# Altium PCB Hot_plate.PcbDoc
Units mm, origin at the board's own origin, x right, y up, seen from the top; angles counter-clockwise.
Board outline 110 x 50 mm, 2 copper layers (Top Layer, Bottom Layer); 26 components, 22 nets, 78 pads, 164 vias.
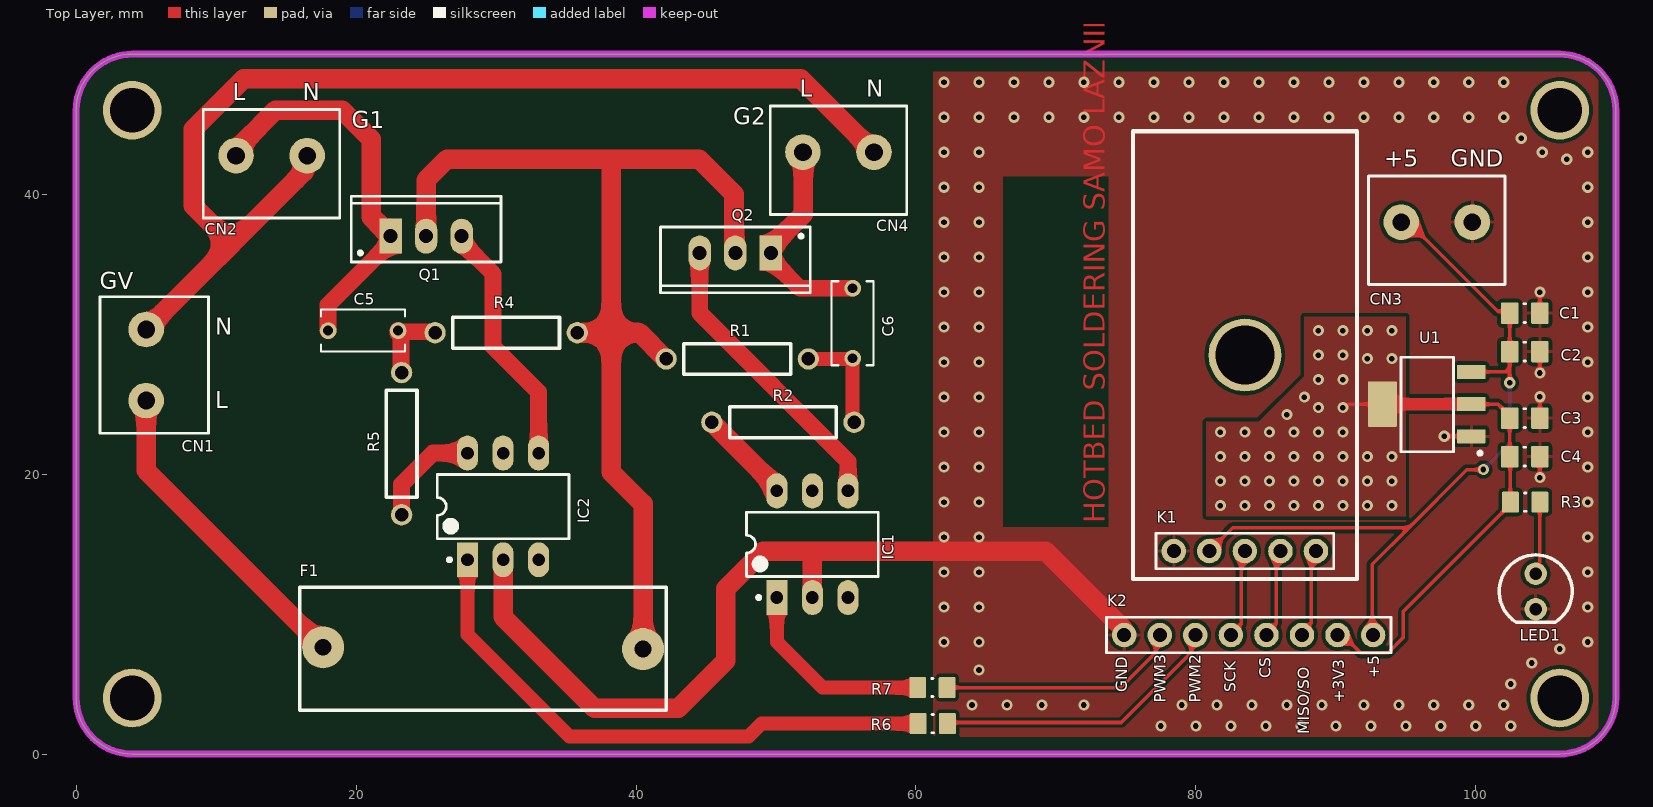
[diagram p0: Top Layer view]
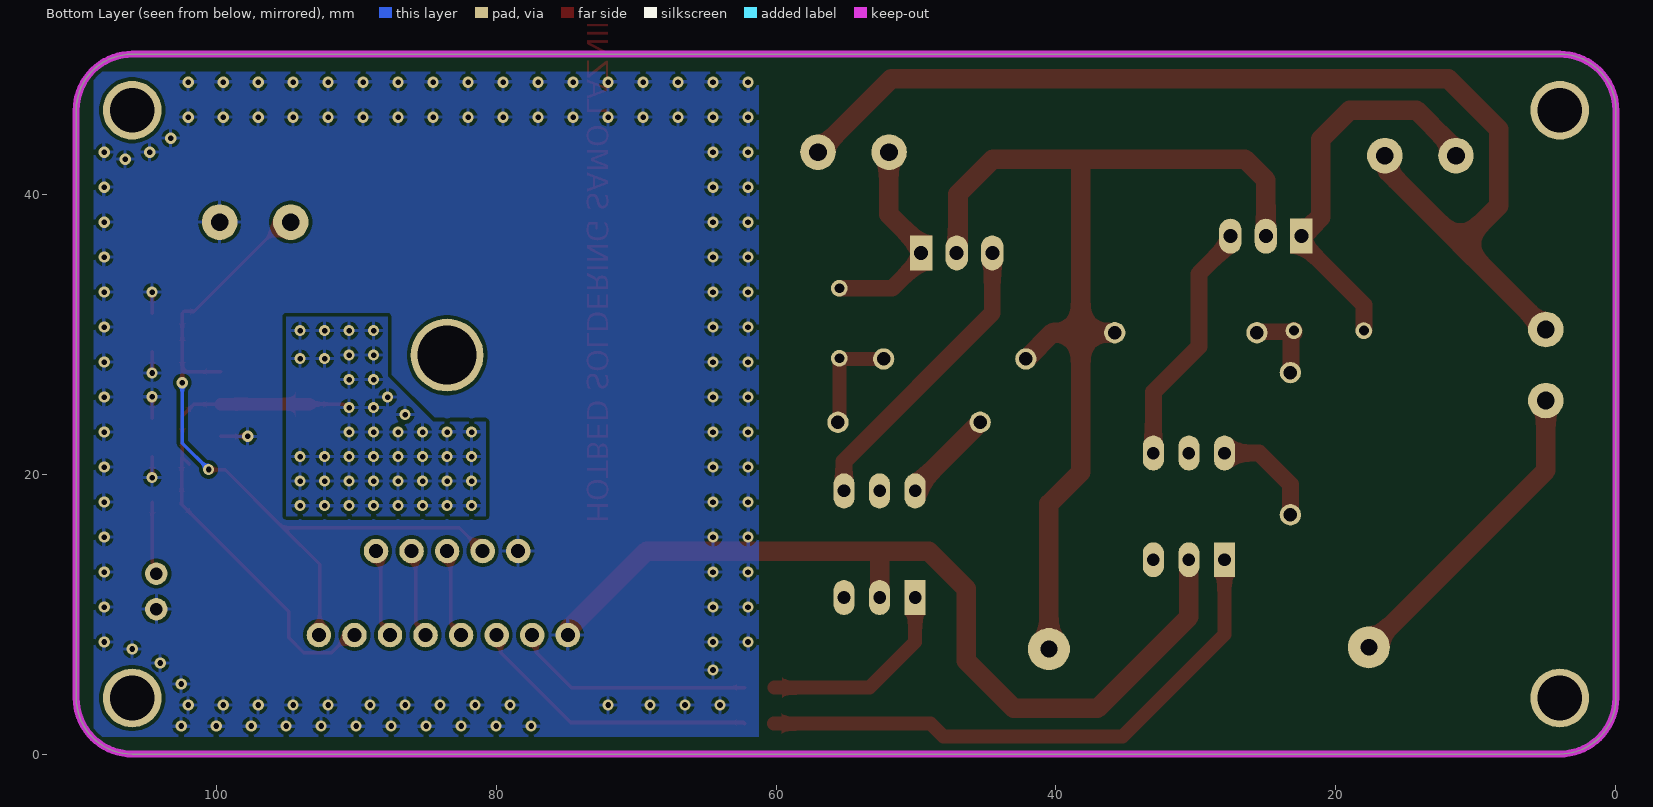
[diagram p1: Bottom Layer view, seen from below]

## Layer stack, top to bottom
Top Solder: solder mask 0.0102, Solder Resist, Dk 3.5
Top Layer: signal copper 0.0356
Dielectric 1: dielectric 0.32, FR-4, Dk 4.8
Bottom Layer: signal copper 0.0356
Bottom Solder: solder mask 0.0102, Solder Resist, Dk 3.5

## Board outline
0,4 0,46 cw(c4,46) 4,50 106,50 cw(c106,46) 110,46 110,3.995 110,4 cw(c106,4) 106,0 4,0 cw(c4,4)

## Design rules (kind name [scope] priority, off if disabled: settings)
Clearance [All] p1: gap=0.254 ignorepadtopadclearanceinfootprint=FALSE except(0: Arc-Hole Track-Hole SMDPad-Hole THPad-Hole Via-Hole Fill-Hole Poly-Hole Region-Hole Text-Hole)
PolygonConnect PolygonConnect_4 [All vs IsNamedPolygon('GND_TOP')] p1: thpad.connectstyle=Relief thpad.reliefconductorwidth=0.254 thpad.reliefentries=4 thpad.polygonreliefangle="90 Angle" thpad.airgapwidth=0.254 smdpad.connectstyle=Relief smdpad.reliefconductorwidth=0.254 smdpad.reliefentries=4 smdpad.polygonreliefangle="90 Angle" smdpad.airgapwidth=0.254 via.connectstyle=Direct via.reliefconductorwidth=0.254 via.reliefentries=4 via.polygonreliefangle="90 Angle" via.airgapwidth=0.254
PolygonConnect PolygonConnect_3 [All vs IsNamedPolygon('Hlajenje 3v3_TOP')] p2: thpad.connectstyle=Relief thpad.reliefconductorwidth=0.254 thpad.reliefentries=4 thpad.polygonreliefangle="90 Angle" thpad.airgapwidth=0.254 smdpad.connectstyle=Direct smdpad.reliefconductorwidth=0.254 smdpad.reliefentries=4 smdpad.polygonreliefangle="90 Angle" smdpad.airgapwidth=0.254 via.connectstyle=Direct via.reliefconductorwidth=0.254 via.reliefentries=4 via.polygonreliefangle="90 Angle" via.airgapwidth=0.254
PolygonConnect PolygonConnect_2 [All vs IsNamedPolygon('Hlajenje 3v3_TOP')] p3: connectstyle=Relief reliefconductorwidth=0.254 reliefentries=4 polygonreliefangle="90 Angle" airgapwidth=0.254
PolygonConnect PolygonConnect_1 [All vs IsNamedPolygon('Hlajenje 3v3_TOP')] p4: thpad.connectstyle=Relief thpad.reliefconductorwidth=0.254 thpad.reliefentries=4 thpad.polygonreliefangle="90 Angle" thpad.airgapwidth=0.254 smdpad.connectstyle=Direct smdpad.reliefconductorwidth=0.254 smdpad.reliefentries=4 smdpad.polygonreliefangle="90 Angle" smdpad.airgapwidth=0.254 via.connectstyle=Direct via.reliefconductorwidth=0.254 via.reliefentries=4 via.polygonreliefangle="90 Angle" via.airgapwidth=0.254
PolygonConnect [All] p5: connectstyle=Relief reliefconductorwidth=0.254 reliefentries=4 polygonreliefangle="90 Angle" airgapwidth=0.254
RoutingVias [All] p1: holewidth=0.4 width=0.8 viastyle="Through Hole" minholewidth=0.3 minwidth=0.7 maxholewidth=0.8 maxwidth=1.2
SolderMaskExpansion [All] p1: expansion=0.102 istentingtop=FALSE
Width [All] p1: maxlimit=2.54 minlimit=0.254 preferedwidth=0.254
30 further rules are at their usual default settings.

## Classes and differential pairs
component class "Components Class2": C5 C6 CN1 CN2 CN4 F1 Q1 Q2 R1 R2 R4 R5
component class "Components Class1": C6 CN4 Q2 R1 R2
component class Hot_plate: C1 C2 C3 C4 C5 C6 CN1 CN2 CN3 CN4 F1 IC2 K1 K2 LED1 Q1 Q2 R3 R4 R5 R6 R7 U1

## Components (designator, comment, footprint, x,y, rotation, side; value= is the part's Value field where it differs from the comment)
C1 "4u7" C2012_0805I_M 103.5,31.5 r0 top
C2 "4u7" C2012_0805I_M 103.5,28.75 r0 top
C3 "4u7" C2012_0805I_M 103.5,24 r0 top
C4 "4u7" C2012_0805I_M 103.5,21.25 r0 top
C5 "100n" "C ceramic F5mm" 23,30.25 r180 top
C6 "100n" "C ceramic F5mm" 55.475,28.275 r90 top
CN1 "VRSTNA SPONKA 2P/16A" "VRSTNA SPONKA 2P/16A" 5,25.25 r90 top
CN2 "VRSTNA SPONKA 2P/16A" "VRSTNA SPONKA 2P/16A" 11.42,42.75 r0 top
CN3 "VRSTNA SPONKA 2P/16A" "VRSTNA SPONKA 2P/16A" 94.67,38 r0 top
CN4 "VRSTNA SPONKA 2P/16A" "VRSTNA SPONKA 2P/16A" 51.92,43 r0 top
F1 "Fuse" FUSE-holder 17.64,7.627 r0 top
IC1 "MOC3041" DIP-6_L 50.06,11.18 r0 top
IC2 "MOC3041" DIP-6_L 27.96,13.88 r0 top
K1 "H1x5" H1x5 88.58,14.5 r0 top
K2 "H1x8" H1x8 92.66,8.5 r0 top
LED1 "GEEN" LED-THT_5 104.276,12.886 r0 top
Q1 "BTA16-600BQ" TO-220AB 25,37 r0 top
Q2 "BTA16-600BQ" TO-220AB 47.09,35.8 r180 top
R1 "470R" R400 42.15,28.225 r0 top
R2 "380R" R400 55.575,23.7 r180 top
R3 "50R" R2012_0805I_M 103.525,18 r0 top
R4 "470R" R400 35.8,30.1 r180 top
R5 "380R" R400 23.25,27.25 r270 top
R6 "200R" R2012_0805I_M 61.2,2.175 r0 top
R7 "200R" R2012_0805I_M 61.175,4.75 r0 top
U1 "LM1117MPX-3.3" DCY0004A_M 96.5,25 r180 top

## Footprints (in the part's own frame and the unit in brackets; to place one, negate y for a bottom-side part, rotate by r counter-clockwise, add the part's x,y. Pads: shape width x height; smd on the part's side, far side on the other; paste and mask are expansions set on the pad)
C2012_0805I_M [mm] "Chip Capacitor, 2-Leads, Body 2.05x1.25mm, IPC Low Density"
  rrect15% 1.25x1.55 smd: 1(-1.075,0) 2(1.075,0)
  silkscreen extent -0.05,-0.67 0.05,0.68, body extent -1.1,-0.7 1.1,0.7, height 1.4
"C ceramic F5mm" [mm]
  round 1.2 hole 0.7: 1(0,0) 2(5,0)
  silkscreen extent -0.5,-1.5 5.5,1.5, body extent -0.3,-1.25 5.3,1.25, height 5
DCY0004A_M [mm]
  rrect10% 2.05x1 smd: 1(-3.175,2.3) 2(-3.175,0) 3(-3.175,-2.3)
  rrect5% 2.05x3.25 smd: 4(3.175,0)
  silkscreen extent -3.93,-3.35 1.85,3.62, body extent -3.5,-3.25 3.5,3.25, height 1.62
DIP-6_L [mm]
  rect 1.5x2.5 hole 0.9: 1(0,0)
  oval 1.5x2.5 hole 0.9: 2(2.54,0) 3(5.08,0) 4(5.08,7.62) 5(2.54,7.62) 6(0,7.62)
  silkscreen extent -2.16,-0.12 7.24,6.1, body extent -0.99,-0.17 6.13,7.7, height 4.3
FUSE-holder [mm]
  round 3 hole 1.2: 1(0,0) 2(22.86,-0.127)
  silkscreen extent -1.68,-4.5 24.51,4.29, body extent -0.18,-4.63 22.98,4.37, height 13.44
H1x5 [mm]
  round 1.75 hole 1: 1(0,0) 2(-2.54,0) 3(-5.08,0) 4(-7.62,0) 5(-10.16,0)
  silkscreen extent -11.43,-1.27 1.27,1.27, body extent -11.43,-1.27 1.27,1.27, height 8.4
H1x8 [mm]
  round 1.75 hole 1: 1(0,0) 2(-2.54,0) 3(-5.08,0) 4(-7.62,0) 5(-10.16,0) 6(-12.7,0) 7(-15.24,0) 8(-17.78,0)
  silkscreen extent -19.05,-1.27 1.27,1.27, body extent -19.05,-1.27 1.27,1.27, height 8.4
LED-THT_5 [mm] "LED; 2 Leads"
  round 1.6 hole 0.9: 1(0,0) 2(0,-2.54)
  silkscreen extent -2.6,-3.47 2.6,1.34, body extent -2.93,-3.79 2.87,1.6, height 24
R400 [mil]
  round 60 hole 38: 1(0,0) 2(400,0)
  silkscreen extent 50,-43 350,43, body extent -12,-45 412,46, height 91
R2012_0805I_M [mm] "Chip Resistor, 2-Leads, Body 2.05x1.25mm, IPC Low Density"
  rrect15% 1.2x1.5 smd: 1(-1.05,0) 2(1.05,0)
  silkscreen extent -0.05,-0.65 0.05,0.65, body extent -1.1,-0.7 1.1,0.7, height 0.8
TO-220AB [mm] "TO, Thru-Hole, Vertical, Heatsink Mounted; 3 In-Line Leads; Pitch 2.54 mm"
  rect 1.6x2.5 hole 1: 1(-2.54,0)
  oval 1.6x2.5 hole 1: 2(0,0) 3(2.54,0)
  silkscreen extent -5.35,-1.85 5.35,2.85, body extent -5.2,-1.73 5.2,2.77, height 19
"VRSTNA SPONKA 2P/16A" [mm]
  round 2.54 hole 1.27: 1(0,0) 2(5.08,0)
  silkscreen extent -2.34,-4.44 7.42,3.3, body extent -2.46,-4.57 7.54,3.43, height 10.01

## Part data
C1 C2 C3 C4 C5 C6: library part C, "Capacitor"
IC1 IC2: library part MOC3041M, "Zero-Cross Oproisolator Triac Driver Output", Case Style="DIP 6", Manufacturer="FAIRCHILD SEMICONDUCTOR", AVK Code=3064001000, ComponentLink1Description=Datasheet, ComponentLink1URL=http://www.farnell.com/datasheets/1639837.pdf, ComponentLink2Description="Datasheet 2", ComponentLink2URL=http://www.farnell.com/datasheets/410597.pdf, Manufacturer Part Number=MOC3041M, Pricing="1=1,31, 25=0,9, 100=0,72, 250=0,61, 500=0,35 (EUR)", RoHS=YES
K1: "Header 1x5 (male)"
K2: "Header 1x8 (male)"
LED1: library part LED, "L-7104ZGCK", Case Style="0805 [2012 Metric]", AVK Code=17002000201, LatestRevisionDate=08-Jul-2005, LatestRevisionNote="Mech Layer 1 removed.", PackageDescription="LED; 2 Leads", PackageReference=LED-0, Published=8-Jun-2000, Publisher="Altium Limited"
Q1 Q2: library part Triac, "SENSITIVE GATE TRIAC"
R1 R2 R3 R4 R5 R6 R7: library part R, "R"
U1: "800mA Low-Dropout Linear Regulator, 4-pin SOT-223, Pb-Free /  / DataSheet:  / https://www.ti.com/lit/ds/symlink/lm1117.pdf?ts=1629838143263&ref_url=https%253A%252F%252Fwww.google.com%252F", Manufacturer="Texas Instruments", PackageTopMarking=XYTT*N05A, PartNumber=LM1117MPX-3.3/NOPB, PowerWise=N, Code=FRL-33-LM1117, Code_IPC=SOT223-4, Code_JEDEC=TO-261-AA, ComponentLink1Description="Datasheet URL", ComponentLink1URL=http://www.ti.com/general/docs/lit/getliterature.tsp?genericPartNumber=LM1117-N&fileType=pdf, CompType="LDO IC", High-Reliability=Y, PackageDescription="Molded SOT-223, 6.50 x 3.56 x 1.6mm Body, 4 Lead, 2.3mm Pitch", PackageReference=DCY0004A, PinCount=4, RoHS=Y
F1: ComponentLink1Description=http://www.littelfuse.com/data/en/Data_Sheets/646_648_640_LF_050901.pdf, ComponentLink1URL=http://www.littelfuse.com/data/en/Data_Sheets/646_648_640_LF_050901.pdf

## Free pads (board coordinates)
  round 4.2 hole 3.2: 7(4,46) 8(4,4) 9(106,4) 10(106,46)
  round 5.2 hole 4.2: 11(83.5,28.5)

## Via types
v1: diameter 0.8, hole 0.4, Top Layer to Bottom Layer, tented both sides, 164 vias

## Nets (pads, with @x,y where several pads share a name; then routed paths per layer and width w, separated by ;. In a path a pad name is that pad's centre, name@x,y a point inside that pad or via, vN(x,y) a via of type N, cw(c..) or ccw(c..) an arc to the next point about the centre after c; other vN are vias at no path point)
+3V3: C3.1 C4.1 K2.2 R3.1 U1.2 U1.4 | length 37.8
  Top Layer w0.254: K2.2 90.5,8.5 91.756,7.244 93.744,7.244 94.8,8.3 94.8,10.175 102.475,17.85 R3.1 102.461,18.014 102.461,21.214 C4.1 ; v1(90.5,24.75) 90.648,24.75 90.898,25 U1.4 ; U1.2 99.684,24.991 101.584,24.991 102.425,24.15 102.425,21.215 C4.1@101.927,20.717
  Top Layer w0.9: U1.4 U1.2
  other v1: 81.75,17.75 83.5,17.75 85.25,17.75 87,17.75 88.75,17.75 90.5,17.75 92.25,17.75 94,17.75 81.75,19.5 83.5,19.5 85.25,19.5 87,19.5 88.75,19.5 90.5,19.5 92.25,19.5 94,19.5 81.75,21.25 83.5,21.25 85.25,21.25 87,21.25 88.75,21.25 90.5,21.25 92.25,21.25 94,21.25 81.75,23 83.5,23 85.25,23 87,23 88.75,23 90.5,23 86.5,24.25 88.75,24.75 87.75,25.5 88.75,26.75 90.5,26.75 92.25,28.25 94,28.25 88.75,28.5 90.5,28.5 88.75,30.25 90.5,30.25 92.25,30.25 94,30.25
+5: C1.1 C2.1 CN3.1 K1.4 K2.1 U1.3 | length 56.1
  Top Layer w0.254: K1.4 82.635,16.175 95.222,16.175 ; K2.1 92.597,8.563 92.597,13.551 95.222,16.175 ; CN3.1 95.199,38 101.568,31.632 102.293,31.632 C1.1 C2.1 102.425,27.594 ; U1.3 102.131,27.3 102.425,27.594 ; v1(100.539,20.329) 100.521,20.31 99.357,20.31 95.222,16.175 ; v1(102.425,26.525) 102.425,27.594
  Bottom Layer w0.254: v1(100.539,20.329) 102.425,22.214 v1(102.425,26.525)
CS: K1.2 K2.4 | length 6.4
  Top Layer w0.254: K2.4 85.04,8.646 85.75,9.356 85.75,13.805 86.04,14.095 K1.2
GND: C1.2 C2.2 C3.2 C4.2 CN3.2 IC1.2 IC2.2 K1.5 K2.8 LED1.2 U1.1 | length 72.9
  Top Layer w0.254: v1(97.75,22.7) U1.1 ; v1(104.575,19.75) C4.2 ; C3.2 v1(104.575,25.525) ; v1(104.575,27.225) C2.2 ; C1.2 v1(104.575,33) v1@104.6,32.975
  Top Layer w1.4: IC2.2 30.5,9.8 37.044,3.256 43.006,3.256 46.4,6.65 46.4,11.8 49.1,14.5 52.675,14.5 ; IC1.2 52.6,14.425 52.675,14.5 ; K2.8 74.813,8.567 74.813,8.937 69.25,14.5 52.675,14.5
  other v1: 77.5,2 80,2 82.5,2 85,2 87.5,2 90,2 92.5,2 95,2 97.5,2 100,2 102.5,2 64,3.5 66.5,3.5 69,3.5 72,3.5 79,3.5 81.5,3.5 84,3.5 86.5,3.5 89,3.5 92,3.5 92,3.5 94.5,3.5 97,3.5 99.5,3.5 102,3.5 102,3.5 102.5,5 64.5,6 104,6.5 106,7.5 62,8 64.5,8 108,8 62,10.5 64.5,10.5 108,10.5 62,13 64.5,13 108,13 62,15.5 64.5,15.5 108,15.5 62,18 64.5,18 108,18 62,20.5 64.5,20.5 108,20.5 62,23 64.5,23 108,23 62,25.5 64.5,25.5 108,25.5 62,28 64.5,28 108,28 62,30.5 64.5,30.5 108,30.5 62,33 64.5,33 108,33 62,35.5 64.5,35.5 108,35.5 62,38 64.5,38 108,38 62,40.5 64.5,40.5 108,40.5 106.5,42.5 62,43 64.5,43 104.75,43 108,43 103.25,44 62,45.5 64.5,45.5 67,45.5 69.5,45.5 72,45.5 74.5,45.5 77,45.5 79.5,45.5 82,45.5 84.5,45.5 87,45.5 89.5,45.5 92,45.5 94.5,45.5 97,45.5 99.5,45.5 102,45.5 62,48 64.5,48 67,48 69.5,48 72,48 74.5,48 77,48 79.5,48 82,48 84.5,48 87,48 89.5,48 92,48 94.5,48 97,48 99.5,48 102,48
L: F1.2 Q1.2 Q2.2 R1.1 R4.1 | length 75
  Top Layer w1.4: Q1.2 25,41 26.5,42.5 38.177,42.5 ; R4.1 38.228,30.1 ; F1.2 40.5,17.88 38.228,20.153 38.228,30.1 ; R1.1 42.116,28.225 40.241,30.1 38.228,30.1 ; Q2.2 47,35.89 47,40 44.5,42.5 38.177,42.5 ; 38.177,42.5 38.228,42.45 38.228,30.1
MISO/SO: K1.1 K2.3 | length 6.4
  Top Layer w0.254: K2.3 87.58,8.726 88.25,9.396 88.25,13.765 88.58,14.095 K1.1
N: CN1.2 CN2.2 CN4.2 | length 78.8
  Top Layer w1.4: CN1.2 11.105,36.435 ; CN2.2 16.282,42.532 16.282,41.612 11.105,36.435 ; CN4.2 51.75,48.25 11.975,48.25 8.35,44.625 8.35,39.19 11.105,36.435
NetC5_1: C5.1 R4.2 R5.1 | length 5.8
  Top Layer w1.2: R5.1 23.196,27.304 23.196,29.865 23,30.061 C5.1 23.075,30.175 25.565,30.175 R4.2
NetC5_2: C5.2 CN2.1 Q1.1 | length 28.5
  Top Layer w0.381: Q1.1@22.46,36.55 Q1.1
  Top Layer w1.2: C5.2 18,32.09 Q1.1@22.46,36.55
  Top Layer w1.4: CN2.1 11.42,43.058 11.99,43.628 11.99,43.74 14.25,46 19,46 21.089,43.911 21.089,38.37 21.909,37.55 22.36,37.55 22.46,37.45 Q1.1
NetC6_1: C6.1 R1.2 R2.1 | length 7.8
  Top Layer w1: R1.2 55.425,28.225 C6.1 55.475,23.8 R2.1
NetC6_2: C6.2 CN4.1 Q2.1 | length 15.3
  Top Layer w1.2: Q2.1@49.63,35.35 51.705,33.275 C6.2
  Top Layer w1.4: Q2.1@49.63,35.35 Q2.1 49.63,36.25 51.95,38.57 51.95,42.97 CN4.1
NetCN1_1: CN1.1 F1.1 | length 22.9
  Top Layer w1.4: CN1.1 5,20.267 F1.1
NetIC1_1: IC1.1 R7.1 | length 14.6
  Top Layer w1: IC1.1 50.06,8.015 53.325,4.75 R7.1
NetIC1_4: IC1.4 Q2.3 | length 21.4
  Top Layer w1.2: Q2.3 44.55,31.5 55.14,20.91 IC1.4
NetIC1_6: IC1.6 R2.2 | length 6.8
  Top Layer w1.4: R2.2 50.06,19.055 IC1.6
NetIC2_1: IC2.1 R6.1 | length 40.9
  Top Layer w1: IC2.1 27.96,8.54 35.25,1.25 48.024,1.25 48.949,2.175 R6.1
NetIC2_4: IC2.4 Q1.3 | length 17.8
  Top Layer w1.2: Q1.3 27.54,36.55 29.775,34.315 29.775,29.125 33.04,25.86 IC2.4
NetIC2_6: IC2.6 R5.2 | length 7.8
  Top Layer w1.2: R5.2 23.25,19.25 25.5,21.5 IC2.6
NetLED1_1: LED1.1 R3.2 | length 5.2
  Top Layer w0.254: LED1.1 104.533,13.143 104.533,13.666 104.575,13.707 R3.2
PWM2: K2.6 R6.2 | length 20.9
  Top Layer w0.254: R6.2 62.325,2.25 74.67,2.25 79.674,7.254 79.674,8.214 K2.6
PWM3: K2.7 R7.2 | length 17.3
  Top Layer w0.254: R7.2 74.63,4.75 77.134,7.254 77.134,8.214 K2.7
SCK: K1.3 K2.5 | length 6.4
  Top Layer w0.254: K2.5 82.5,8.566 83.25,9.316 83.25,14.25 K1.3
pads on no net: IC1.3 IC1.5 IC2.3 IC2.5

## Polygon pours and split planes (outlines as drawn)
GND on Top Layer "GND_TOP" (solid, remove dead copper, pour order 2): 61.25,48.75 61.25,1.25 108.75,1.25 108.75,48.75
+3V3 on Top Layer "Hlajenje 3v3_TOP" (solid, remove dead copper, pour order 0): 95,31.25 95,17 80.75,17 80.75,23.75 84.5,23.75 87.75,27 87.75,31.25
GND on Bottom Layer "GND_BOTTOM" (solid, remove dead copper, pour order 3): 61.25,48.75 61.25,1.25 108.75,1.25 108.75,48.75
+3V3 on Bottom Layer "Hlajenje 3v3_BOTTOM" (solid, remove dead copper, pour order 1): 95,31.25 95,17 80.75,17 80.75,23.75 84.5,23.75 87.75,27 87.75,31.25

## Keep-outs
Keep-Out Layer:
  lines w0.5: 110,3.995 110,46 ccw(c106,46) 106,50 4,50 ccw(c4,46) 0,46 0,4 ccw(c4,4) 4,0 106,0 ccw(c106,4) 110,4

## Other copper
Top Layer:
  text "HOTBED SOLDERING SAMO LAZNIK in PRIMOZ AMBROZIC" at 73.5,16.5 h1.52 r90

## Silkscreen, mask and mechanical layers (free items; w line width, h text height)
Top Overlay:
  lines w0.3: 75.5,12.5 75.5,44.5 91.5,44.5 91.5,12.5 75.5,12.5
  text "L" at 51.7,46.95 h1.2
  text "N" at 56.45,46.95 h1.2
  text "L" at 11.2,46.7 h1.2
  text "N" at 16.2,46.7 h1.2
  text "G2" at 46.95,44.95 h1.2
  text "G1" at 19.7,44.7 h1.2
  text "+5" at 93.45,41.95 h1.2
  text "GND" at 98.2,41.95 h1.2
  text "GV" at 1.7,33.2 h1.2
  text "N" at 9.95,29.95 h1.2
  text "L" at 9.95,24.7 h1.2
  text "CS" at 85.348,5.402 h0.81 r90
  text "+5" at 93.098,5.402 h0.81 r90
  text "GND" at 75.098,4.402 h0.81 r90
  text "SCK" at 82.848,4.402 h0.81 r90
  text "PWM3" at 77.848,3.652 h0.81 r90
  text "PWM2" at 80.348,3.652 h0.81 r90
  text "+3V3" at 90.598,3.652 h0.81 r90
  text "MISO/SO" at 88.098,1.402 h0.81 r90
Top Solder:
  text "HOTBED SOLDERING SAMO LAZNIK in PRIMOZ AMBROZIC" at 73.5,16.5 h1.52 r90